# Altium PCB keyMANDevices.PcbDoc
Units mil, origin at the board's own origin, x right, y up, seen from the top; angles counter-clockwise.
Board outline 6000 x 4000 mil, 2 copper layers (Top Layer, Bottom Layer); 37 components, 41 nets, 177 pads, 2 vias.
Unrouted connection lines stored in the file: 112.
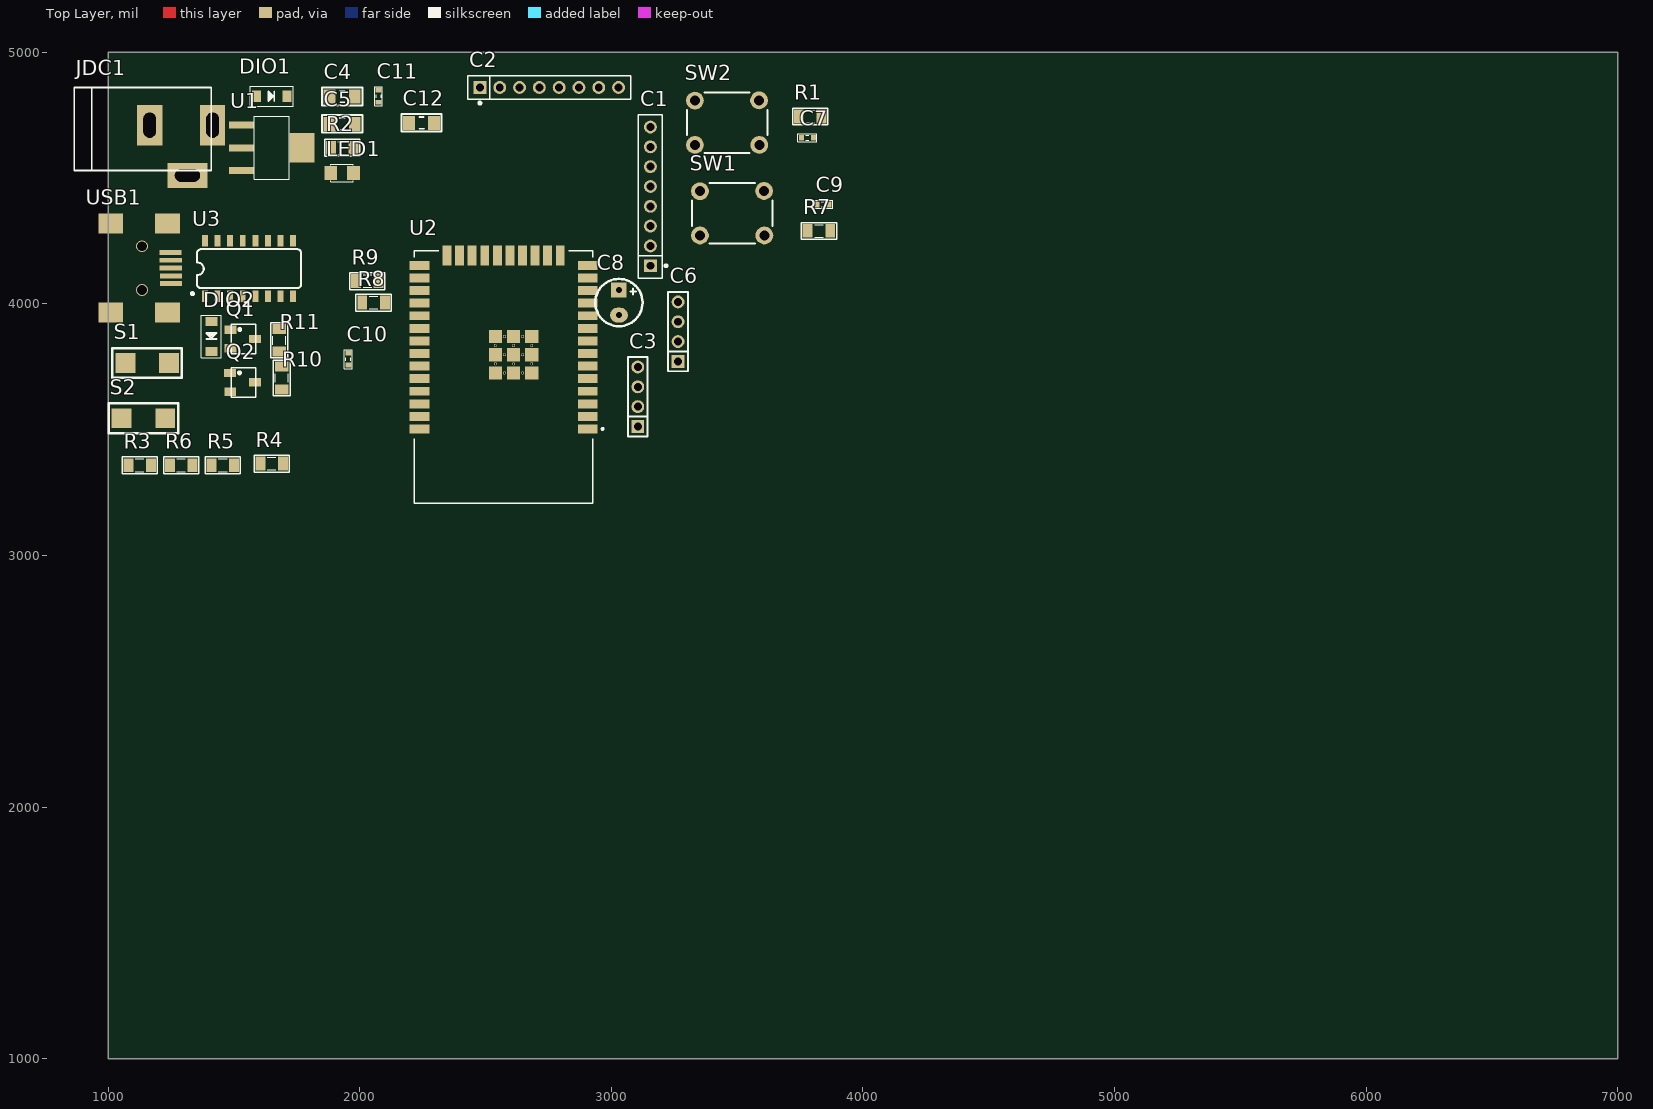
[diagram p0: Top Layer view]
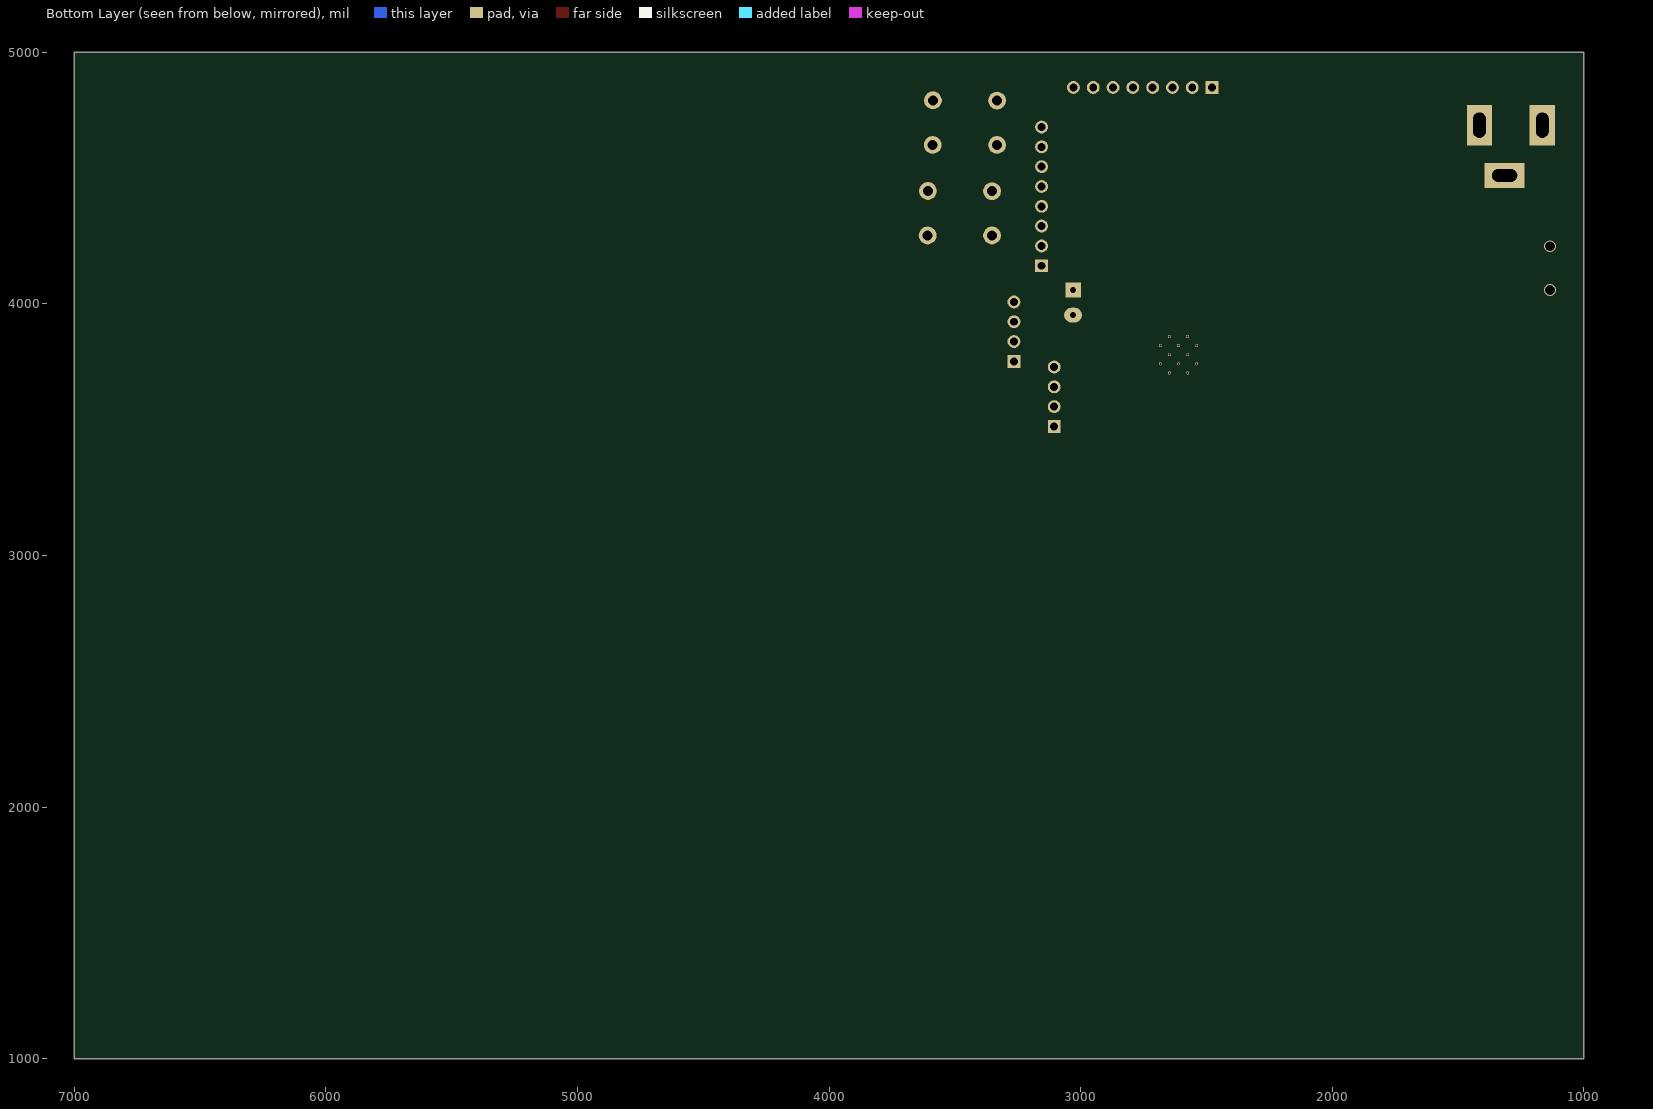
[diagram p1: Bottom Layer view, seen from below]

## Layer stack, top to bottom
Top Solder: solder mask 0.4, Solder Resist, Dk 3.5
Top Layer: signal copper 1.4
Dielectric 1: dielectric 12.6, FR-4, Dk 4.8
Bottom Layer: signal copper 1.4
Bottom Solder: solder mask 0.4, Solder Resist, Dk 3.5

## Board outline
1000,1000 7000,1000 7000,5000 1000,5000

## Design rules (kind name [scope] priority, off if disabled: settings)
Clearance [All] p1: gap=10 ignorepadtopadclearanceinfootprint=FALSE except(0: Arc-Hole Track-Hole SMDPad-Hole THPad-Hole Via-Hole Fill-Hole Poly-Hole Region-Hole Text-Hole)
PolygonConnect [All] p1: connectstyle=Relief reliefconductorwidth=10 reliefentries=4 polygonreliefangle="90 Angle" airgapwidth=10
RoutingVias [All] p1: holewidth=28 width=50 viastyle="Through Hole" minholewidth=28 minwidth=50 maxholewidth=28 maxwidth=50
SolderMaskExpansion [All] p1: expansion=4
Width [All] p1: maxlimit=10 minlimit=10 preferedwidth=10
30 further rules are at their usual default settings.

## Components (designator, comment, footprint, x,y, rotation, side; value= is the part's Value field where it differs from the comment)
C1 "RFID" J8-C1T 3155,4426.89 r90 top
C2 "KeyPad" J8-C1T 2753.11,4860 r0 top
C3 "LCD_I2C" J4-D1T 3105,3630.63 r90 top
C4 "104" CAP_0805 1930,4825 r0 top value=33p
C5 "104" CAP_0805 1930,4716 r0 top value=33p
C6 "Motor/Encoder" J4-D1T 3265,3889.37 r90 top
C7 "100nF" CAP_0402 3779,4660 r0 top value=33p
C8 "Cap Pol" C3MM 3030,4005 r270 top
C9 "100nF" CAP_0402 3841,4395 r0 top value=33p
C10 "104" CAP_0402 1955,3780 r90 top value=33p
C11 "104" CAP_0402 2075,4825 r90 top value=33p
C12 "104" CAP_0805 2245,4720 r0 top value=33p
DIO1 "Diode SMD" DIO-SMD-123 1650,4825 r180 top value=1N5007
DIO2 "Diode SMD" DIO-SMD-123 1410,3870 r90 top value=1N5007
JDC1 "Jac DC" DC-IN 1290,4610 r0 top
LED1 "LED" LED-0805-Red 1975,4520 r180 top value="LED 3 ly Single Colour"
Q1 "2N222" SOT23D 1535,3860 r270 top value=C1815
Q2 "2N222" SOT23D 1534.21,3687.6 r270 top value=C1815
R1 "10k" RES-SMD-0805 3790,4745 r0 top
R2 "1k" RES-SMD-0805 1930,4620 r0 top
R3 "12k" RES-SMD-0805 1125.37,3358.35 r0 top
R4 "12k" RES-SMD-0805 1650,3365 r0 top
R5 "470" RES-SMD-0805 1455.37,3358.35 r0 top
R6 "470" RES-SMD-0805 1290.37,3358.35 r0 top
R7 "10k" RES-SMD-0805 3825,4290 r0 top
R8 "470" RES-SMD-0805 2055,4005 r0 top
R9 "470" RES-SMD-0805 2030,4090 r0 top
R10 "12k" RES-SMD-0805 1690,3705 r90 top
R11 "12k" RES-SMD-0805 1680,3855 r90 top
S1 "SW-SMD" "SW 3x2x4" 1155,3765 r180 top
S2 "SW-SMD" "SW 3x2x4" 1140,3545 r180 top
SW1 "SW-4P-S" SW-4P-S 3480,4360 r0 top
SW2 "SW-4P-S" SW-4P-S 3460,4720 r0 top
U1 "LM1117-ADJ" LM1117-SOP 1580,4620 r270 top
U2 "ESP32-WROOM-32" MODULE_ESP32-WROOM-32 2571.75,3709.57 r180 top
U3 "CH340C" SO016 1560,4140.24 r0 top
USB1 "USB_M" USB_B_MINI_SMD 1248,4204 r90 top

## Footprints (in the part's own frame and the unit in brackets; to place one, negate y for a bottom-side part, rotate by r counter-clockwise, add the part's x,y. Pads: shape width x height; smd on the part's side, far side on the other; paste and mask are expansions set on the pad)
C3MM [mm]
  rect 1.5x1.58 hole 0.6: 1(-1.27,0)
  oval 1.5x1.8 hole 0.6: 2(1.27,0)
  silkscreen extent -2.39,-2.39 2.39,2.39, body extent -2,-2.03 1.99,1.97, height 7.01
CAP_0402 [mm]
  rect 0.5x0.6 smd: 1(-0.61,0) 2(0.61,0)
  silkscreen extent -0.97,-0.38 0.97,0.41, body extent -0.5,-0.27 0.5,0.26, height 0.35
CAP_0805 [mm]
  rect 1.2x1.4 smd: 1(-1.27,-0.025) 2(1.27,-0.025)
  silkscreen extent -2.03,-0.91 2.03,0.86, body extent -1.01,-0.66 1.01,0.61, height 0.61
DC-IN [mil] "Jac DC input"
  rect 100x160 hole 50 slot 100 at 90 deg: 1(125,100) 2(-125,100)
  rect 160x100 hole 50 slot 100 at 0 deg: 3(25,-100)
  silkscreen extent -425,-80 120,250, body extent -410,-105 134,269, height 434
DIO-SMD-123 [mm]
  rect 0.9x1.2 smd: 1(1.524,0) 2(-1.524,0)
  silkscreen extent -2.16,-1.02 2.16,1.02, body extent -1.76,-0.8 1.94,0.8, height 1.25
J4-D1T [mm] "4 pins, 1 row, straight, gold plating"
  rect 1.3x1.3 hole 0.8: 1(-3,0)
  round 1.3 hole 0.8: 2(-1,0) 3(1,0) 4(3,0)
  silkscreen extent -4,-1 4,1, body extent -4,-1 4,1, height 6.01
J8-C1T [mm] "8p, 1 row, straight, gold plating"
  rect 1.3x1.3 hole 0.8: 1(-7,0)
  round 1.3 hole 0.8: 2(-5,0) 3(-3,0) 4(-1,0) 5(1,0) 6(3,0) 7(5,0) 8(7,0)
  silkscreen extent -8.25,-1.71 8.25,1.2, body extent -8.25,-1.2 8.25,1.2, height 4.31
LED-0805-Red [mil]
  rect 50x55 smd: 1(0,0) 2(90,0)
  silkscreen extent 0,-35 90,35, body extent 5,-25 85,25, height 43
LM1117-SOP [mm]
  rect 0.7x2.54 smd: 1(-2.3,-1.27) 2(0,-1.27) 3(2.3,-1.27)
  rect 3x2.54 smd: 2(0,4.826)
  silkscreen extent -3.18,0 3.17,3.56, body extent -3.25,-1.78 3.25,5.18, height 1.68
MODULE_ESP32-WROOM-32 [mm]
  rect 2x0.9 smd: 1(-8.5,5.26) 2(-8.5,3.99) 3(-8.5,2.72) 4(-8.5,1.45) 5(-8.5,0.18) 6(-8.5,-1.09) 7(-8.5,-2.36) 8(-8.5,-3.63) 9(-8.5,-4.9) 10(-8.5,-6.17) 11(-8.5,-7.44) 12(-8.5,-8.71) 13(-8.5,-9.98) 14(-8.5,-11.25) 25(8.5,-11.25) 26(8.5,-9.98) 27(8.5,-8.71) 28(8.5,-7.44) 29(8.5,-6.17) 30(8.5,-4.9) 31(8.5,-3.63) 32(8.5,-2.36) 33(8.5,-1.09) 34(8.5,0.18) 35(8.5,1.45) 36(8.5,2.72) 37(8.5,3.99) 38(8.5,5.26)
  rect 0.9x2 smd: 15(-5.715,-12.25) 16(-4.445,-12.25) 17(-3.175,-12.25) 18(-1.905,-12.25) 19(-0.635,-12.25) 20(0.635,-12.25) 21(1.905,-12.25) 22(3.175,-12.25) 23(4.445,-12.25) 24(5.715,-12.25)
  rect 1.33x1.33 smd: 39_1(-2.835,-0.405) 39_2(-1,-0.405) 39_3(0.835,-0.405) 39_4(-2.835,-2.24) 39_5(-1,-2.24) 39_6(0.835,-2.24) 39_7(-2.835,-4.075) 39_8(-1,-4.075) 39_9(0.835,-4.075)
  round 0.3 hole 0.2: 39_10(-1.917,-0.405) 39_11(-0.082,-0.405) 39_12(-2.835,-1.322) 39_13(-1,-1.322) 39_14(0.835,-1.322) 39_15(-1.917,-2.24) 39_16(-0.082,-2.24) 39_17(-2.835,-3.157) 39_18(-1,-3.157) 39_19(0.835,-3.157) 39_20(-1.917,-4.075) 39_21(-0.082,-4.075)
  silkscreen extent -10.1,-12.75 9,12.75, body extent -10.54,-12.75 8.98,12.75, height 3.2
RES-SMD-0805 [mil]
  rect 39.37x55 smd: 1(-45,0) 2(45,0)
  silkscreen extent -70,-34 70,33, body extent -39,-25 39,25, height 31
SO016 [mm]
  rect 0.6x1.2 smd: 1(-4.445,-2.8) 2(-3.175,-2.8) 3(-1.905,-2.8) 4(-0.635,-2.8) 5(0.635,-2.8) 6(1.905,-2.8) 7(3.175,-2.8) 8(4.445,-2.8) 9(4.445,2.8) 10(3.175,2.8) 11(1.905,2.8) 12(0.635,2.8) 13(-0.635,2.8) 14(-1.905,2.8) 15(-3.175,2.8) 16(-4.445,2.8)
  silkscreen extent -5.84,-2.67 5.26,1.95
SOT23D [mm] "SOT 23C - 1-3-2 - BCE"
  rect 0.85x1.2 smd: 1(-0.95,-1.25) 2(0.94,-1.245) 3(0,1.25)
  silkscreen extent -1.5,-1.14 1.5,1.32, body extent -1.5,-1.17 1.5,1.33, height 1.06
"SW 3x2x4" [mm]
  rect 2x2 smd: 1(-2.2,0) 2(2.2,0)
  silkscreen extent -3.5,-1.5 3.5,1.5, body extent -2.45,-1.45 2.45,1.45, height 2
SW-4P-S [mm]
  round 1.8 hole 1: 1(-3.251,2.222) 2(-3.251,-2.248) 3(3.251,-2.248) 4(3.226,2.248)
  silkscreen extent -4.06,-3.05 4.06,3.05, body extent -4.11,-3.01 4.1,2.99, height 9.52
USB_B_MINI_SMD [mm]
  rect 2x2.5 smd: 0(-6.075,0.305) 0(-6.071,6.045) 0(2.925,0.305) 0(2.929,6.045)
  rect 0.5x2.25 smd: 1(0,0) 2(-0.787,-0.013) 3(-1.575,-0.025) 4(-2.362,-0.038) 5(-3.15,-0.051)
  body extent -6.92,-0.37 3.78,8.83, height 3.95

## Part data
C1 C2: library part JP8x1-2.0, "WR-PHD 2.00 mm Socket Header", Manufacturer="Würth Elektronik eiSos GmbH", partNo=62000811821, ComponentLink1 Description=Manufacturer, ComponentLink1URL=http://www.we-online.com, ComponentLink2 Description=Datasheet, ComponentLink2URL=http://katalog.we-online.de/em/datasheet/6200xx11821.pdf, Created by="Karrer Zheng", Created Date="2 April 2013", NoPins=08
C3 C6: library part JP4x1-2.0, "WR-PHD 2.00 mm Socket Header", Manufacturer="Würth Elektronik eiSos GmbH", partNo=62000411821, ComponentLink1 Description=Manufacturer, ComponentLink1URL=http://www.we-online.com, ComponentLink2 Description=Datasheet, ComponentLink2URL=http://katalog.we-online.de/em/datasheet/6200xx11821.pdf, Created by="Karrer Zheng", Created Date="2 April 2013", NoPins=04
C4 C5 C7 C9 C10 C11 C12: library part CapSMD, "Capacitor", LatestRevisionDate=17-Jul-2002, LatestRevisionNote="Re-released for DXP Platform.", PackageReference=RAD-0.3, Published=8-Jun-2000, Publisher="Altium Limited"
C8: "Polarized Capacitor (Axial)", LatestRevisionDate=17-Jul-2002, LatestRevisionNote="Re-released for DXP Platform.", PackageReference=POLAR0.8, Published=8-Jun-2000, Publisher="Altium Limited"
DIO1 DIO2: "Default Diode", Code - JEDEC=DO-214-AB, Published=8-Jun-2000, Publisher="Altium Limited", Revision="July-2002: Re-released for DXP Platform."
JDC1: library part DCIN, "Jac DC input"
LED1: "LED Single colour Green and Red"
Q1 Q2: "NPN 600mW, ECB", =C2383
R1 R2 R3 R4 R5 R6 R7 R8 R9 R10 R11: library part "Resistor - SMD", "Resistor", Manufacturer="Generic Components", Class=Passive, Published=08/06/2000, Publisher="Altium Hobart Technology Centre"
S1 S2: "Switch", LatestRevisionDate=17-Jul-2002, LatestRevisionNote="Re-released for DXP Platform.", PackageReference=SPST-2, Published=24-Mar-1999, Publisher="Altium Limited"
SW1 SW2: library part SW-4PIN-SMALL, "Switch Small 4 Pin", LatestRevisionDate=17-Jul-2002, LatestRevisionNote="Re-released for DXP Platform.", PackageReference=SPST-2, Published=24-Mar-1999, Publisher="Altium Limited"
U1: "800mA Low-Dropout Linear Regulator", Creator="Nguyen Ba Bien", Website=http://group3i.net
U2: "Bluetooth, WiFi Transceiver Module 2.4GHz ~ 2.5GHz Surface Mount", Package="Module Espressif Systems", Digi-Key_Part_Number=1904-1010-1-ND, Digi-Key_Purchase_URL=https://www.digikey.com/product-detail/en/espressif-systems/ESP32-WROOM-32/1904-1010-1-ND/8544305?utm_source=snapeda&utm_medium=aggregator&utm_campaign=symbol, MF="Espressif Systems", MP=ESP32-WROOM-32, SnapEDA_Link=https://www.snapeda.com/parts/ESP32-WROOM-32/Espressif%20Systems/view-part/2753322/?ref=snap
U3: "USB to serial chip CH340", Package=Package, Availability=Unavailable, Check_prices=https://www.snapeda.com/parts/CH340C/WCH/view-part/5428851/?ref=eda, MF=WCH, MP=CH340C, Price=None, SnapEDA_Link=https://www.snapeda.com/parts/CH340C/WCH/view-part/5428851/?ref=snap

## Via types
v1: diameter 47.24, hole 39.37, Top Layer to Bottom Layer, 2 vias

## Nets (pads, with @x,y where several pads share a name; then routed paths per layer and width w, separated by ;. In a path a pad name is that pad's centre, name@x,y a point inside that pad or via, vN(x,y) a via of type N, cw(c..) or ccw(c..) an arc to the next point about the centre after c; other vN are vias at no path point)
AccessPoint: C9.2 R7.2 SW2.2 SW2.3 U2.7
BOOT: Q2.3 R4.1 R6.2 U2.25
COL1: C2.5 U2.24
COL2: C2.6 U2.26
COL3: C2.7 U2.27
COL4: C2.8 U2.28
Control: C7.2 R1.2 SW1.2 SW1.3 U2.6
DTR: Q2.2 R10.2 U3.13
EN: Q1.3 R3.1 R5.2 U2.3
Encoder: C6.3 U2.11
GND: C1.3 C3.1 C4.1 C5.1 C6.2 C6.4 C7.1 C8.2 C9.1 C10.1 C11.1 C12.1 JDC1.2 JDC1.3 LED1.2 S1.2 S2.2 SW1.1 SW1.4 SW2.1 SW2.4 U1.1 U2.1 U2.15 U2.38 U2.39_1 U2.39_2 U2.39_3 U2.39_4 U2.39_5 U2.39_6 U2.39_7 U2.39_8 U2.39_9 U2.39_10 U2.39_11 U2.39_12 U2.39_13 U2.39_14 U2.39_15 U2.39_16 U2.39_17 U2.39_18 U2.39_19 U2.39_20 U2.39_21 U3.1 USB1.5
IRQ: C1.4
MISO: C1.5 U2.31
MOSI: C1.6 U2.37
Motor: C6.1 U2.10
NetC10_2: C10.2 U3.4
NetDIO1_1: DIO1.1 JDC1.1
NetDIO2_1: DIO2.1 USB1.1
NetLED1_1: LED1.1 R2.2
NetQ1_1: Q1.1 R10.1
NetQ2_1: Q2.1 R11.1
NetR5_1: R5.1 S1.1
NetR6_1: R6.1 S2.1
NetR8_1: R8.1 U3.2
NetR9_1: R9.1 U3.3
ROW1: C2.1 U2.13
ROW2: C2.2 U2.14
ROW3: C2.3 U2.16
ROW4: C2.4 U2.23
RST: C1.2
RTS: Q1.2 R11.2 U3.14
RX0: R8.2 U2.34
SCK: C1.7 U2.30
SCL_I2C: C3.4 U2.36
SDA_I2C: C3.3 U2.33
SS: C1.8 U2.29
TX0: R9.2 U2.35
UD+: U3.5 USB1.3
UD-: U3.6 USB1.2
VDD3V3: C1.1 C4.2 C8.1 R1.1 R3.2 R4.2 R7.1 U1.2 U2.2
VDD5V: C3.2 C5.2 C11.2 C12.2 DIO1.2 DIO2.2 R2.1 U1.3 U3.16
pads on no net: U2.4 U2.5 U2.8 U2.9 U2.12 U2.17 U2.18 U2.19 U2.20 U2.21 U2.22 U2.32 U3.7 U3.8 U3.9 U3.10 U3.11 U3.12 U3.15 USB1.0 USB1.4
copper on no net:
  other v1: 1134.43,4055.39 1134.43,4228.61

## Text inside footprints (layer, text, board x,y; h text height)
U2: Mechanical 13 "ANTENNA" at 2807.97,3355.24 h70 r180